# EAGLE board ESP_NOW_uni_FULL (EAGLE 9.7.0)
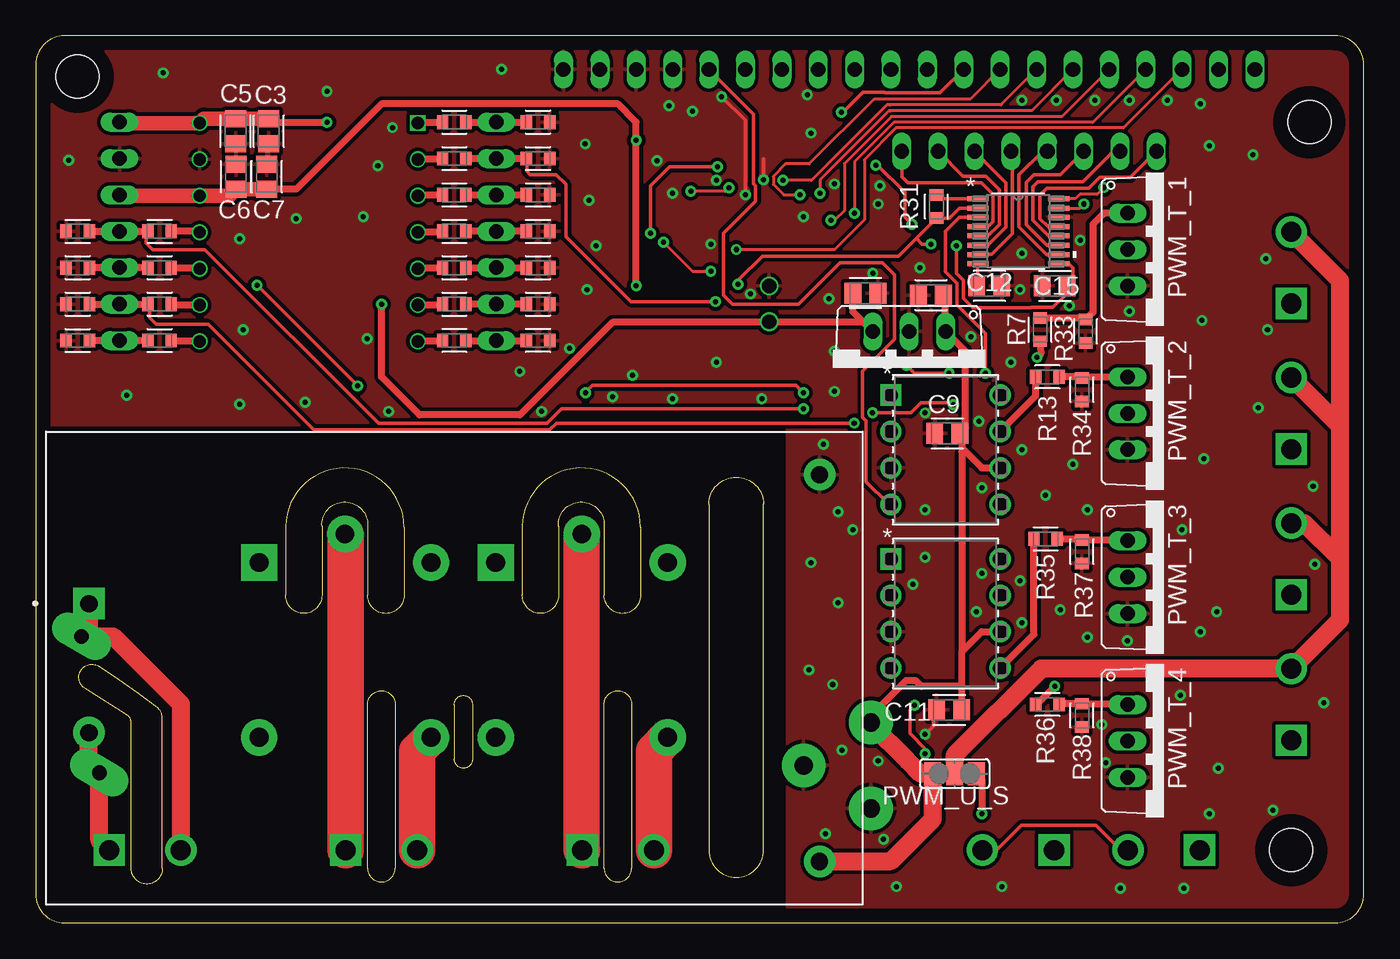
[diagram p0: board, top side]
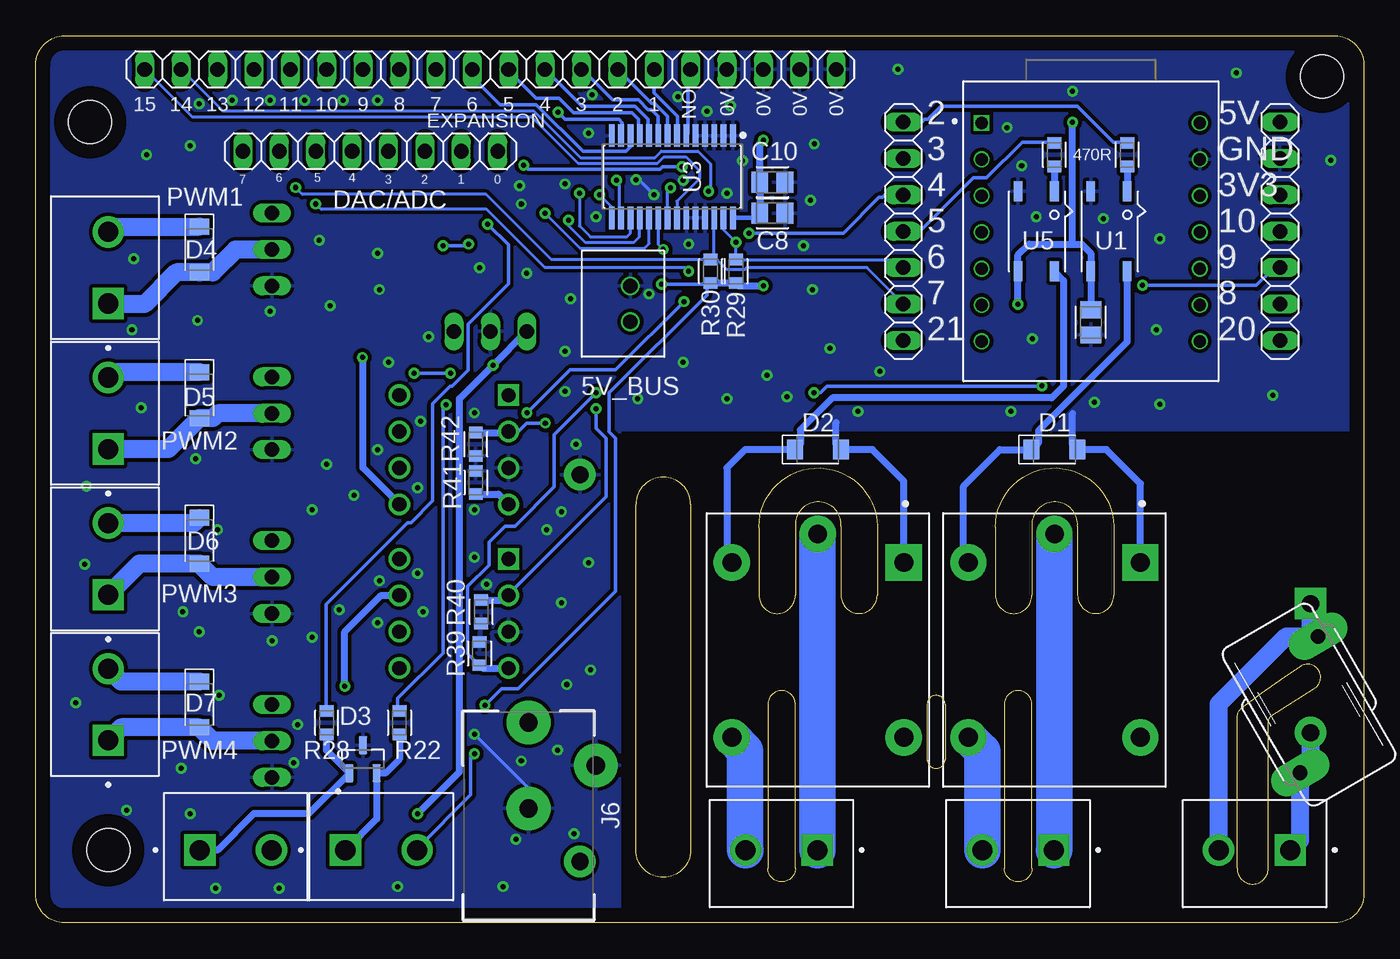
[diagram p1: board, bottom side, seen from below]

Size 92.69 x 61.9 mm. Coordinates in mm from the lower left corner, seen from the top.
Outline: 0,59.9 0,2 arc90 2,0 90.69,0 arc90 92.69,2 92.69,59.9 arc90 90.69,61.9 2,61.9 arc90 0,59.9
Copper layers (1*16): Top 0.035mm / dielectric 1.5mm / Bottom 0.035mm
Design rules "Fusion Electronics Design Rules *": minimum track width 0.2mm, minimum drill 0.35mm, track to track 0.2mm, track to pad 0.2mm, pad to pad 6mil, via to via 6mil, smd to smd 6mil, copper to edge 40mil, drill to drill 6mil, minimum pad ring 0.1mm, minimum via ring 0.204mm, stop-mask expansion 4mil, vias tented up to drill 9999mil, thermal gap 10mil
Holes 3 mm at 88.9,55.88 87.63,5.08 2.92,59.05
tRestrict: 12 lines
Milling: 40 lines

## Footprints (pad centres in the part's own frame; a part is rotated, then mirrored left to right if it is on the bottom)
B2B-XH-A = drill 1: 1 0,0; 2 2.5,0
CAPC2012X110 = smd 1.165 x 1.465: 1 -0.875,0; 2 0.875,0
SODFL3718X115 = smd 1.115 x 1.361: 1 -1.6,0; 2 1.6,0
SOT95P230X110-3N = smd 1.26 x 0.59: 1 -0.98,0.95; 2 -0.98,-0.95; 3 0.98,0
1X08 = drill 1.016 long: 1 -8.89,0; 2 -6.35,0; 3 -3.81,0; 4 -1.27,0; 5 1.27,0; 6 3.81,0; 7 6.35,0; 8 8.89,0
PJ-102AH = drill 1.279 pad 3.051 slot 3 rotated 90: 1 -6.5,0; 2 -0.5,0 | drill 1.279 pad 3.051 slot 3: 3 -3.5,4.7
1X20 = drill 1.016 long: 1 -24.13,0; 2 -21.59,0; 3 -19.05,0; 4 -16.51,0; 5 -13.97,0; 6 -11.43,0; 7 -8.89,0; 8 -6.35,0; 9 -3.81,0; 10 -1.27,0; 11 1.27,0; 12 3.81,0; 13 6.35,0; 14 8.89,0; 15 11.43,0; 16 13.97,0; 17 16.51,0; 18 19.05,0; 19 21.59,0; 20 24.13,0
RELAY_SRD-05VDC-SL-C = drill 1.32 pad 2.54 square: A1 -6.1,6 | drill 1.32 pad 2.54: A2 -6.1,-6; NC 6.1,6; NO 6.1,-6 | drill 1.29 pad 2.54: COM -8.1,0
1X07 = drill 1.016 long: 1 -7.62,0; 2 -5.08,0; 3 -2.54,0; 4 0,0; 5 2.54,0; 6 5.08,0; 7 7.62,0
HANDSON_KF301-2P = drill 1.4 pad 2.184 square: 1 -2.5,0 | drill 1.4 pad 2.184: 2 2.5,0
CONV_HLK-20M12 = drill 1.2 pad 2.184 square: 1 -25.5,4.5 | drill 1.2 pad 2.184: 2 -25.5,-4.5; 3 25.5,13.5; 4 25.5,-13.5
TO220V = drill 1.016 long: 1 -2.54,-2.54; 2 0,-2.54; 3 2.54,-2.54
SJ_2 = smd 1.168 x 1.6: 1 -1.524,0; 2 0,0; 3 1.524,0
RESC1608X60 = smd 0.799 x 0.974: 1 -0.815,0; 2 0.815,0
CLARE_SO4 = smd 0.6 x 1.4: 1 -1.27,-2.8; 2 1.27,-2.8; 3 1.27,2.8; 4 -1.27,2.8
RU-16_ADI = smd 1.461 x 0.351: 1 -2.825,2.275; 2 -2.825,1.625; 3 -2.825,0.975; 4 -2.825,0.325; 5 -2.825,-0.325; 6 -2.825,-0.975; 7 -2.825,-1.625; 8 -2.825,-2.275; 9 2.825,-2.275; 10 2.825,-1.625; 11 2.825,-0.975; 12 2.825,-0.325; 13 2.825,0.325; 14 2.825,0.975; 15 2.825,1.625; 16 2.825,2.275
SOP65P640X110-28 = smd 1.572 x 0.407: 1 -2.872,4.225; 2 -2.872,3.575; 3 -2.872,2.925; 4 -2.872,2.275; 5 -2.872,1.625; 6 -2.872,0.975; 7 -2.872,0.325; 8 -2.872,-0.325; 9 -2.872,-0.975; 10 -2.872,-1.625; 11 -2.872,-2.275; 12 -2.872,-2.925; 13 -2.872,-3.575; 14 -2.872,-4.225; 15 2.872,-4.225; 16 2.872,-3.575; 17 2.872,-2.925; 18 2.872,-2.275; 19 2.872,-1.625; 20 2.872,-0.975; 21 2.872,-0.325; 22 2.872,0.325; 23 2.872,0.975; 24 2.872,1.625; 25 2.872,2.275; 26 2.872,2.925; 27 2.872,3.575; 28 2.872,4.225
MODULE_113991054 = drill 0.85 square: 1 -7.62,7.556 | drill 0.85: 2 -7.62,5.016; 3 -7.62,2.477; 4 -7.62,-0.064; 5 -7.62,-2.603; 6 -7.62,-5.144; 7 -7.62,-7.684; 8 7.62,-7.684; 9 7.62,-5.144; 10 7.62,-2.603; 11 7.62,-0.064; 12 7.62,2.477; 13 7.62,5.016; 14 7.62,7.556
PDIP8_300MC_MCH = drill 0.991 pad 1.499 square: 1 0,0 | drill 0.991 pad 1.499: 2 0,-2.54; 3 0,-5.08; 4 0,-7.62; 5 7.62,-7.62; 6 7.62,-5.08; 7 7.62,-2.54; 8 7.62,0
MOV-10D561 = drill 1.016 pad 2.184 long: 1 -2.921,-3.81; 2 2.921,3.81

## Placement (x,y rotation side)
5V_BUS  B2B-XH-A  [B2B-XH-A]  51.19,44.45 270 bottom
C1  10 uF  [CAPC2012X110]  62.48,43.81 180 top
C2  0.1uF  [CAPC2012X110]  57.91,43.94 0 top
C3  10uF  [CAPC2012X110]  16.26,55.24 270 top
C4  10uF  [CAPC2012X110]  19.05,41.91 270 bottom
C5  10uF  [CAPC2012X110]  13.94,55.24 270 top
C6  10uF  [CAPC2012X110]  13.97,52.07 270 top
C7  10uF  [CAPC2012X110]  16.13,52.07 270 top
C8  10uF  [CAPC2012X110]  41.27,49.53 180 bottom
C9  10uF  [CAPC2012X110]  63.63,34.16 180 top
C10  10uF  [CAPC2012X110]  41.27,51.69 180 bottom
C11  10uF  [CAPC2012X110]  63.75,14.86 180 top
C12  2.2 uF  [CAPC2012X110]  66.55,44.45 0 top
C15  100 nF  [CAPC2012X110]  71.12,44.45 180 top
D1  SCHOTTKY_MBR0520LT1GDO-219  [SODFL3718X115]  21.59,33.02 0 bottom
D2  SCHOTTKY_MBR0520LT1GDO-219  [SODFL3718X115]  38.1,33.02 0 bottom
D3  PESD3V3L2BT,215  [SOT95P230X110-3N]  69.85,11.43 90 bottom
D4  SCHOTTKY_MBR0520LT1GDO-219  [SODFL3718X115]  81.28,46.99 270 bottom
D5  SCHOTTKY_MBR0520LT1GDO-219  [SODFL3718X115]  81.28,36.83 270 bottom
D6  SCHOTTKY_MBR0520LT1GDO-219  [SODFL3718X115]  81.28,26.67 270 bottom
D7  SCHOTTKY_MBR0520LT1GDO-219  [SODFL3718X115]  81.28,15.24 270 bottom
DAC/ADC  PINHD-1X08_1X08M  [1X08]  69.34,53.85 0 bottom
J6  PJ-102AH  [PJ-102AH]  58.3,7.49 270 bottom
JP1  PINHD-1X20  [1X20]  60.96,59.56 180 bottom
K1  SRD-05VDC-SL-C  [RELAY_SRD-05VDC-SL-C]  21.59,19.05 270 bottom
K2  SRD-05VDC-SL-C  [RELAY_SRD-05VDC-SL-C]  38.1,19.05 270 bottom
PHD1  PINHD-1X07_1X07M  [1X07]  5.84,48.26 90 bottom
PHD2  PINHD-1X07_1X07M  [1X07]  32.13,48.26 90 bottom
POWER  KF301-2P  [HANDSON_KF301-2P]  7.62,5.08 180 bottom
PS1  HLK-20M12  [CONV_HLK-20M12]  29.21,17.78 0 top
PWM1  KF301-2P  [HANDSON_KF301-2P]  87.63,45.72 90 bottom
PWM2  KF301-2P  [HANDSON_KF301-2P]  87.63,35.56 90 bottom
PWM3  KF301-2P  [HANDSON_KF301-2P]  87.63,25.4 90 bottom
PWM4  KF301-2P  [HANDSON_KF301-2P]  87.63,15.24 90 bottom
PWM_T_1  IRFB4110PBF  [TO220V]  78.74,46.99 270 top
PWM_T_2  IRFB4110PBF  [TO220V]  78.74,35.56 270 top
PWM_T_3  IRFB4110PBF  [TO220V]  78.74,24.13 270 top
PWM_T_4  IRFB4110PBF  [TO220V]  78.74,12.7 270 top
PWM_U_S  [SJ_2]  64.14,10.41 180 top
R1  [RESC1608X60]  35.05,55.88 180 top
R2  [RESC1608X60]  35.05,53.34 180 top
R3  [RESC1608X60]  35.05,50.8 180 top
R4  [RESC1608X60]  35.05,48.26 180 top
R5  [RESC1608X60]  35.05,45.72 180 top
R6  [RESC1608X60]  35.05,43.18 180 top
R7  47R  [RESC1608X60]  70.1,41.4 270 top
R8  [RESC1608X60]  35.05,40.64 0 top
R9  [RESC1608X60]  2.92,40.64 180 top
R10  [RESC1608X60]  2.92,43.18 180 top
R11  [RESC1608X60]  2.92,45.72 180 top
R12  [RESC1608X60]  2.92,48.26 180 top
R13  47R  [RESC1608X60]  70.61,38.1 0 top
R14  420R  [RESC1608X60]  16.51,53.59 270 bottom
R15  420R  [RESC1608X60]  21.59,53.59 270 bottom
R16  [RESC1608X60]  29.21,55.88 180 top
R17  [RESC1608X60]  29.21,53.34 180 top
R18  [RESC1608X60]  29.21,50.8 180 top
R19  [RESC1608X60]  29.21,48.26 180 top
R20  [RESC1608X60]  29.21,45.72 180 top
R21  [RESC1608X60]  29.21,43.18 180 top
R22  1k  [RESC1608X60]  67.31,13.97 90 bottom
R23  [RESC1608X60]  29.21,40.64 0 top
R24  [RESC1608X60]  8.64,40.64 180 top
R25  [RESC1608X60]  8.64,43.18 180 top
R26  [RESC1608X60]  8.64,45.72 180 top
R27  [RESC1608X60]  8.64,48.26 180 top
R28  1k  [RESC1608X60]  72.39,13.97 270 bottom
R29  [RESC1608X60]  43.81,45.47 90 bottom
R30  [RESC1608X60]  45.59,45.47 270 bottom
R31  [RESC1608X60]  62.87,49.99 270 top
R33  10k  [RESC1608X60]  73.28,41.27 270 top
R34  10k  [RESC1608X60]  73.03,37.21 270 top
R35  47R  [RESC1608X60]  70.48,26.8 180 top
R36  47R  [RESC1608X60]  70.61,15.24 0 top
R37  10k  [RESC1608X60]  73.03,25.91 270 top
R38  10k  [RESC1608X60]  73.03,14.48 270 top
R39  100k  [RESC1608X60]  61.72,18.8 90 bottom
R40  100k  [RESC1608X60]  61.59,21.72 270 bottom
R41  100k  [RESC1608X60]  61.98,30.73 90 bottom
R42  100k  [RESC1608X60]  61.98,33.4 270 bottom
RELAY1  KF301-2P  [HANDSON_KF301-2P]  24.13,5.08 180 bottom
RELAY2  KF301-2P  [HANDSON_KF301-2P]  40.64,5.08 180 bottom
SW1  KF301-2P  [HANDSON_KF301-2P]  68.58,5.08 0 bottom
SW2  KF301-2P  [HANDSON_KF301-2P]  78.74,5.08 0 bottom
U1  CPC1018N  [CLARE_SO4]  17.78,48.26 180 bottom
U2  AD5593RBRUZRU-16_ADI  [RU-16_ADI]  68.58,48.26 0 top
U3  PCA9685PW_28-TSSOP  [SOP65P640X110-28]  48.26,52.07 270 bottom
U4  113991054  [MODULE_113991054]  19.05,48.26 0 bottom
U5  CPC1018N  [CLARE_SO4]  22.86,48.26 180 bottom
U6  TC4427EPAPDIP8_300MC_MCH  [PDIP8_300MC_MCH]  59.69,36.83 0 top
U7  TC4427EPAPDIP8_300MC_MCH  [PDIP8_300MC_MCH]  59.69,25.4 0 top
V2  MOV-10D561K  [MOV-10D561]  3.81,15.24 30 bottom
VR1  LM7805_TO220V OR STEP_DOWN  [TO220V]  60.96,38.73 180 top

## Library data of the parts
5V_BUS = Connector; CATEGORY: Connectors; DATASHEET: https://www.jst-mfg.com/product/pdf/eng/eXH.pdf; DESCRIPTION: Connector Header Through Hole 2 position 0.098" (2.50mm); MANUFACTURER: JST Sales America Inc.; MPN: B2B-XH-A; OPERATING_TEMPERATURE: -25°C ~ 85°C; PACKAGE_SIZE: NA; PACKAGE_TYPE: Through Hole; PART_STATUS: Active; PITCH: 0.098" (2.50mm); ROHS: Compliant; SERIES: XH; SUBCATEGORY: Rectangular Connectors; TYPE: Male Headers
C1-C12 C15 = Capacitor; CATEGORY: Capacitor; PACKAGE_SIZE: 0805; PACKAGE_TYPE: SMD; SUBCATEGORY: Ceramic Capacitors; TYPE: MLCC
D1 D2 D4-D7 = Diode; CATEGORY: Diode; DATASHEET: https://www.onsemi.com/download/data-sheet/pdf/mbr0520lt1-d.pdf; DESCRIPTION: Diode 20 V 500mA Surface Mount SOD-123; FORWARD_CURRENT: 500mA; FORWARD_VOLTAGE: 385mV; MANUFACTURER: onsemi; MPN: MBR0520LT1G; OPERATING_TEMPERATURE: -65°C ~ 125°C; PACKAGE_SIZE: SOD-123; PACKAGE_TYPE: Surface Mount; PART_STATUS: Active; REVERSE_VOLTAGE: 20V; ROHS: Compliant; SERIES: MBR0520; SUBCATEGORY: Schottky Diodes; TYPE: Schottky Power Rectifier; ZENER_VOLTAGE: NA
D3 = PESD3V3L2BT_215; AVAILABILITY: In Stock; CHECK_PRICES: https://www.snapeda.com/parts/PESD3V3L2BT,215/NXP+Semiconductors/view-part/?ref=eda; DESCRIPTION: PESDxL2BT Series 26 V 101 pF Low Capacitance ESD Protection Diode - SOT-23-3; MF: NXP Semiconductors; MP: PESD3V3L2BT,215; PACKAGE: SOT-23-3 NXP Semiconductors; PRICE: None; SNAPEDA_LINK: https://www.snapeda.com/parts/PESD3V3L2BT,215/NXP+Semiconductors/view-part/?ref=snap
DAC/ADC PHD1 PHD2 = Tinkercad
J6 = Connector; CATEGORY_L1: Connectors; CATEGORY_L2: Power Connectors; CATEGORY_L3: DC Jack Male; DATASHEET: https://www.sameskydevices.com/product/resource/pj-102ah.pdf; DESCRIPTION: Power Barrel Connector Jack 2.00mm ID (0.079") & 5.50mm OD (0.217") Through Hole & Right Angle; MANUFACTURER: Same Sky; MPN: PJ-102AH; OPERATING_TEMPERATURE: -25°C ~ 85°C; PACKAGE: Through Hole; PACKAGE_SIZE: NA; PART_STATUS: Active; PITCH: NA; ROHS: Compliant; SERIES: PJ-102
JP1 = Connector; CATEGORY: Connectors; DESCRIPTION: Header-Straight-10 Position; PACKAGE_TYPE: Through Hole; PITCH: 0.100" (2.54mm); SUBCATEGORY: Headers; TYPE: Male Pins
K1 K2 = SRD-05VDC-SL-C; AVAILABILITY: In Stock; CHECK_PRICES: https://www.snapeda.com/parts/SRD-05VDC-SL-C/Songle+Relay/view-part/?ref=eda; DESCRIPTION: 5V Trigger Relay Module For Arduino And Raspberry Pi 5V Trigger Relay Module For Arduino And Raspberry Pi; MF: Songle Relay; MP: SRD-05VDC-SL-C; PACKAGE: NON STANDARD-5 Songle Relay; PRICE: None; SNAPEDA_LINK: https://www.snapeda.com/parts/SRD-05VDC-SL-C/Songle+Relay/view-part/?ref=snap
POWER PWM1-PWM4 RELAY1 RELAY2 SW1 SW2 = KF301-2P; AVAILABILITY: Not in stock; CHECK_PRICES: https://www.snapeda.com/parts/KF301-2P/Handson+Technology/view-part/?ref=eda; DESCRIPTION: 2 Pin Terminal Block 5mm Pitch; MF: Handson Technology; MP: KF301-2P; PACKAGE: None; PRICE: None; SNAPEDA_LINK: https://www.snapeda.com/parts/KF301-2P/Handson+Technology/view-part/?ref=snap
PS1 = HLK-20M12; AVAILABILITY: Not in stock; CHECK_PRICES: https://www.snapeda.com/parts/HLK-20M12/Hi-link/view-part/?ref=eda; DESCRIPTION: 20W ultra-small series module power supply; MF: Hi-link; MP: HLK-20M12; PACKAGE: Non-Standard Hi-link; PRICE: None; SNAPEDA_LINK: https://www.snapeda.com/parts/HLK-20M12/Hi-link/view-part/?ref=snap
PWM_T_1-PWM_T_4 = IRL540N; AVAILABILITY: In Stock; CHECK_PRICES: https://www.snapeda.com/parts/IRL540N/Infineon/view-part/?ref=eda; DESCRIPTION: N-Channel 100 V 36A (Tc) 3.8W (Ta), 140W (Tc) Surface Mount D2PAK; MF: Infineon Technologies; MP: IRL540N; PACKAGE: TO-220 Infineon; PRICE: None; PURCHASE-URL: https://www.snapeda.com/api/url_track_click_mouser/?unipart_id=2773806&manufacturer=Infineon Technologies&part_name=IRL540N&search_term=None; SNAPEDA_LINK: https://www.snapeda.com/parts/IRL540N/Infineon/view-part/?ref=snap
PWM_U_S = jumper
R1-R31 R33-R42 = Resistor; CATEGORY: Resistors; DESCRIPTION: Chip Resistor 1.60 X 0.82 X 0.60 mm body 0603(1608-METRIC) Package; PACKAGE_SIZE: 0603; PACKAGE_TYPE: SMD
U1 U5 = CPC1018N; AVAILABILITY: In Stock; CHECK_PRICES: https://www.snapeda.com/parts/CPC1018N/IXYS/view-part/?ref=eda; DESCRIPTION: Solid State Photo-Coupled Relay (Photorelay) SPST-NO (1 Form A) 4-SOP (0.150, 3.81mm); MF: IXYS Integrated Circuits; MP: CPC1018N; PACKAGE: SOP-4 Ixys Corporation; PRICE: None; SNAPEDA_LINK: https://www.snapeda.com/parts/CPC1018N/IXYS/view-part/?ref=snap
U2 = 2026-07-31_06-15-37_Library; COPYRIGHT: Copyright (C) 2026 Ultra Librarian. All rights reserved.; DATASHEET: https://www.analog.com/media/en/technical-documentation/data-sheets/AD5593R.pdf; DESCRIPTION: 8-Channel, 12-Bit, Configurable ADC/DAC with On-Chip Reference, I2C Interface; MANUFACTURER_NAME: Analog Devices Inc; MANUFACTURER_PART_NUMBER: AD5593RBRUZ
U3 = IC_Power-Management; CATEGORY: Power Management IC; DATASHEET: https://www.nxp.com/docs/en/data-sheet/PCA9685.pdf; DESCRIPTION: LED Driver IC 16 Output Linear PWM Dimming 25mA 28-TSSOP; INPUT_VOLTAGE: 2.3V ~ 5.5V; MANUFACTURER: NXP USA Inc.; MPN: PCA9685PW118; OPERATING_TEMPERATURE: -40°C ~ 85°C; OUTPUT_CURRENT: 25mA; OUTPUT_VOLTAGE: 5.5V; PACKAGE_SIZE: 28-TSSOP; PACKAGE_TYPE: Surface Mount; PART_STATUS: Active; ROHS: Compliant; SERIES: PCA9685; SUBCATEGORY: LED Drivers; THERMALLOSS: 0.4 W; TOPOLOGY: NA; TYPE: Linear
U4 = esp32c3_seeed; AVAILABILITY: In Stock; CHECK_PRICES: https://www.snapeda.com/parts/113991054/Seeed+Studio/view-part/?ref=eda; DESCRIPTION: - ESP32-C3 Transceiver; 802.11 a/b/g/n (Wi-Fi, WiFi, WLAN), Bluetooth® Smart 4.x Low Energy (BLE) 2.4GHz Evaluation Board; MF: Seeed Technology Co., Ltd; MP: 113991054; PACKAGE: None; PRICE: None; SNAPEDA_LINK: https://www.snapeda.com/parts/113991054/Seeed+Studio/view-part/?ref=snap
U6 U7 = 2026-03-07_17-24-57_Library; COPYRIGHT: Copyright (C) 2026 Ultra Librarian. All rights reserved.; MANUFACTURER_NAME: Microchip; MANUFACTURER_PART_NUMBER: TC4427EPA
V2 = MOV-10D561K; AVAILABILITY: In Stock; CHECK_PRICES: https://www.snapeda.com/parts/MOV-10D561K/Bourns/view-part/?ref=eda; DESCRIPTION: 560 V 2.5 kA Varistor 1 Circuit Through Hole Disc 10mm; MF: Bourns; MP: MOV-10D561K; PACKAGE: Disc-10 Bourns; PRICE: None; SNAPEDA_LINK: https://www.snapeda.com/parts/MOV-10D561K/Bourns/view-part/?ref=snap
VR1 = IC_Power-Management; CATEGORY: Power Management IC; DESCRIPTION: Linear Voltage Regulator IC TO-220; PACKAGE_SIZE: TO-220; PACKAGE_TYPE: THT; SERIES: LM7805; SUBCATEGORY: Voltage Regulators; TYPE: Linear & LDO Regulators

## Nets
3V3: C6.2 C7.2 C8.2 C10.2 C15.1 PHD1.5 R29.1 R30.2 R31.2 SW1.2 SW2.2 U2.2 U2.9 U3.28 U4.12
5V: 5V_BUS.2 C2.1 C3.1 C4.1 C5.1 PHD1.7 PWM_U_S.1 U1.3 U2.3 U4.14 U5.3 VR1.3
12V: C1.1 C9.1 C11.1 J6.1 PS1.4 PWM_U_S.3 U6.6 U7.6 VR1.1
EX_PWM1: JP1.6 U3.7
EX_PWM2: JP1.7 U3.8
EX_PWM3: JP1.8 U3.9
EX_PWM4: JP1.9 U3.10
EX_PWM5: JP1.10 U3.11
EX_PWM6: JP1.11 U3.12
EX_PWM7: JP1.12 U3.13
EX_PWM8: JP1.13 U3.15
EX_PWM9: JP1.14 U3.16
EX_PWM10: JP1.15 U3.17
EX_PWM11: JP1.16 U3.18
EX_PWM12: JP1.17 U3.19
EX_PWM13: JP1.18 U3.20
EX_PWM14: JP1.19 U3.21
EX_PWM15: JP1.20 U3.22
FET1_B: R25.1 U4.9
FET2_B: R26.1 U4.10
FET3: R27.1 U4.11
GND: 5V_BUS.1 C1.2 C2.2 C3.2 C4.2 C5.2 C6.1 C7.1 C8.1 C9.2 C10.1 C11.2 C12.2 C15.2 D1.2 D2.2 D3.3 J6.2 J6.3 JP1.1 JP1.2 JP1.3 JP1.4 K1.A1 K2.A1 PHD1.6 PS1.3 PWM_T_1.3 PWM_T_2.3 PWM_T_3.3 PWM_T_4.3 R1.1 R2.1 R3.1 R4.1 R5.1 R6.1 R8.2 R9.2 R10.2 R11.2 R12.2 R33.2 R34.2 R37.2 R38.2 R39.2 R40.2 R41.2 R42.2 U1.2 U2.14 U3.1 U3.2 U3.3 U3.4 U3.5 U3.14 U3.23 U3.24 U3.25 U4.13 U5.2 U6.3 U7.3 VR1.2
IO0: DAC/ADC.8 U2.4
IO1: DAC/ADC.7 U2.5
IO2: DAC/ADC.6 U2.6
IO3: DAC/ADC.5 U2.7
IO4: DAC/ADC.4 U2.10
IO5: DAC/ADC.3 U2.11
IO6: DAC/ADC.2 U2.12
IO7: DAC/ADC.1 U2.13
L: POWER.2 PS1.1 V2.2
L1I: K1.COM RELAY1.1
L1O: K1.NO RELAY1.2
L2I: K2.COM RELAY2.1
L2O: K2.NO RELAY2.2
N: POWER.1 PS1.2 V2.1
N$1: PWM_T_1.1 R7.1 R33.1
N$2: D3.2 R22.1 SW1.1
N$3: R23.1 U4.7
N$4: R24.1 U4.8
N$5: D3.1 R28.2 SW2.1
N$6: C12.1 U2.8
N$8: D2.1 K2.A2 U5.4
N$9: D1.1 K1.A2 U1.4
N$10: R31.1 U2.1
N$11: PWM_T_2.1 R13.2 R34.1
N$12: PWM_T_3.1 R35.1 R37.1
N$13: PHD1.1 R9.1 R24.2
N$14: PHD2.1 R8.1 R23.2
N$15: PWM_T_4.1 R36.2 R38.1
N$16: PHD2.4 R4.2 R15.1 R19.1
N$17: R7.2 U6.5
N$18: R14.2 U1.1
N$19: R15.2 U5.1
N$20: R13.1 U6.7
N$23: R36.1 U7.7
N$24: R35.2 U7.5
N$30: PHD2.7 R1.2 R14.1 R16.1
PWM1: PHD1.2 R10.1 R25.2 R42.1 U6.2
PWM1_OUT: D4.2 PWM1.1 PWM_T_1.2
PWM2_OUT: D5.2 PWM2.1 PWM_T_2.2
PWM2_SLOW: JP1.5 R41.1 U3.6 U6.4
PWM3: PHD1.4 R12.1 R27.2 R40.1 U7.2
PWM3_OUT: D6.2 PWM3.1 PWM_T_3.2
PWM4: PHD1.3 R11.1 R26.2 R39.1 U7.4
PWM4_OUT: D7.2 PWM4.1 PWM_T_4.2
PWM_VCC: D4.1 D5.1 D6.1 D7.1 PWM1.2 PWM2.2 PWM3.2 PWM4.2 PWM_U_S.2
RELE1: R16.2 U4.1
RELE2: R19.2 U4.4
SCL: PHD2.2 R6.2 R21.1 R30.1 U2.16 U3.26
SCL_E: R21.2 U4.6
SDA: PHD2.3 R5.2 R20.1 R29.2 U2.15 U3.27
SDA_E: R20.2 U4.5
SW1: PHD2.6 R2.2 R17.1 R22.2
SW2: PHD2.5 R3.2 R18.1 R28.1
SWITCH1: R18.2 U4.3
SWITCH2: R17.2 U4.2

## Tracks (layer width: path | path; a pad name or v marks a point on that pad's centre or on a via)
3V3  (via drill 0.35)
  Top 0.254: SW1.2 66.28,5.22 67.19,5.22 68.78,6.81 74,6.81 75.59,5.22 76.05,5.22 SW2.2 | v62.08,11.8 62.08,12.17 61.01,13.24 61.01,14.85 v61.34,15.18 | U2.9 72.12,45.98 72.39,45.72 72.39,44.84 C15.1 72,43.93 71.01,42.94 69.48,42.94 69.46,42.93 65.42,42.93 64.76,43.58 64.76,44.83 64.26,45.33 v64.26,47.24 | U2.2 64.48,49.88 63.77,49.17 R31.2 61.45,47.77 | v49.02,44.58 49.02,44.83 50.71,46.52 60.21,46.52 61.45,47.77 | v62.48,47.37 61.85,47.37 61.45,47.77
  Top 0.5: v41.91,44.45 v41.91,54.61 41.91,55.88 40.64,57.15 24.13,57.15 18.18,51.2 C7.2
  Top 1.016: C7.2 C6.2 13.51,50.74 U4.12 5.91,50.74 PHD1.5
  Bottom 0.254: v61.34,15.18 60.18,16.34 59.02,16.34 52.21,23.15 52.21,33.82 52.66,34.28 52.66,37 45.85,43.81 45.85,44.49 45.77,44.58 | SW1.2 66.06,5.22 62.33,8.95 62.33,11.55 v62.08,11.8 | R30.2 45.63,44.72 45.77,44.58 | v49.02,44.58 45.77,44.58 | v64.26,47.24 62.61,47.24 v62.48,47.37
  Bottom 0.305: 42.48,49.2 U3.28
  Bottom 0.5: 42.48,49.2 C8.2 C10.2 42.15,54.37 v41.91,54.61 | R30.2 R29.1 43.61,44.45 v41.91,44.45
5V  (via drill 0.35)
  Top 0.254: U2.3 64.47,49.23 63.5,48.26 63.5,45.45 64.31,44.64 64.31,43.13 66.29,41.15 v66.29,38.35 | v63.75,38.35 61.34,38.35 v60.77,38.92
  Top 0.5: v24.13,43.18 24.13,38.1 26.78,35.45 33.8,35.45 40.26,41.91 51.15,41.91 5V_BUS.2 57.74,41.95 VR1.3 57.04,42.66 C2.1 | v20.32,55.88 16.5,55.88 C3.1 | PWM_U_S.1 66.04,10.03 v66.04,7.62
  Top 1.016: C3.1 C5.1 11.73,56.12 U4.14 5.91,55.82 PHD1.7
  Bottom 0.254: v66.29,38.35 v63.75,38.35
  Bottom 0.5: C4.1 U1.3 19.05,46.74 19.68,47.37 20.32,47.37 | 20.32,47.37 23.37,47.37 24.13,46.61 U5.3 v24.13,43.18 | 20.32,47.37 v20.32,55.88 | v66.04,7.62 63.11,10.55 63.11,36.58 v60.77,38.92 VR1.3
12V
  Top 0.5: C1.1 63.5,43.67 VR1.1 64.89,39.88 64.89,34.55 C9.1 64.63,34.04 64.63,32.88 | U6.6 66.04,31.75 64.77,33.02 64.63,32.88 | C11.1 64.63,16.51 | 64.63,16.51 64.63,18.91 | 64.63,18.91 66.04,20.32 U7.6 | 64.63,32.88 64.63,18.91 | 64.63,16.51 61.82,16.51 61.43,16.9 60.75,16.9 58.3,14.45 J6.1
  Top 1.27: PS1.4 54.75,4.32 59.69,4.32 62.61,7.24 PWM_U_S.3 61.75,10.41 60.86,11.3 58.3,13.87 J6.1
EX_PWM1
  Bottom 0.254: U3.7 47.9,55.16 47.9,56.3 49.53,57.93 JP1.6
EX_PWM2
  Bottom 0.254: U3.8 48.58,55.16 48.58,56.3 49.49,57.2 49.71,57.2 JP1.7
EX_PWM3
  Bottom 0.254: U3.9 49.26,55.16 49.26,56.3 49.71,56.75 49.94,56.75 50.62,57.43 52.44,57.43 54.57,59.56 JP1.8
EX_PWM4
  Bottom 0.254: U3.10 49.94,55.16 49.94,56.07 50.85,56.98 54.56,56.98 JP1.9
EX_PWM5
  Bottom 0.254: U3.11 50.62,55.16 50.62,56.07 51.08,56.52 55.16,56.52 56.18,57.54 57.77,57.54 59.69,59.46 JP1.10
EX_PWM6
  Bottom 0.254: U3.12 51.17,54.15 51.5,53.83 54.49,53.83 57.75,57.09 60.27,57.09 62.23,59.05 JP1.11
EX_PWM7  (via drill 0.35)
  Top 0.254: JP1.12 63.12,57.91 59.28,57.91 59.24,57.96 57.73,57.96 56.35,56.58 v56.24,56.58
  Bottom 0.254: U3.13 51.76,55.16 51.76,55.84 51.98,56.07 55.74,56.07 v56.24,56.58
EX_PWM8  (via drill 0.35)
  Top 0.2: JP1.13 65.23,57.49 58.5,57.49 53.98,52.96 52.34,52.96 51.48,52.1 51.48,51.53 52.21,50.8 v53.34,50.8
  Bottom 0.2: v53.34,50.8 52.48,49.95 U3.15
EX_PWM9  (via drill 0.35)
  Top 0.2: JP1.14 67.38,57.09 59.69,57.09 59.56,57.09 59.41,57.09 54.14,51.82 v52.16,51.82
  Bottom 0.2: U3.16 51.94,49.31 51.94,51.6 v52.16,51.82
EX_PWM10  (via drill 0.35)
  Top 0.2: JP1.15 69.52,56.69 59.69,56.69 | 59.69,56.69 59.67,56.67 59.65,56.67 | 59.69,56.69 59.67,56.69 59.65,56.67 | v54.74,50.93 54.74,51.85 59.56,56.67 59.65,56.67
  Bottom 0.2: v54.74,50.93 54.74,48.64 53.98,47.88 51.44,47.88 51.19,48.13 U3.17
EX_PWM11  (via drill 0.35)
  Top 0.2: v55.5,49.02 55.75,49.02 56.43,49.7 56.43,52.98 59.72,56.27 71.64,56.27 JP1.16
  Bottom 0.2: v55.5,49.02 55.5,48.64 54.34,47.48 50.95,47.48 50.55,47.87 50.55,49.21
  Bottom 0.254: 50.55,49.21 U3.18
EX_PWM12  (via drill 0.35)
  Top 0.2: JP1.17 73.78,55.87 59.89,55.87 57.15,53.13 v57.15,49.53
  Bottom 0.2: U3.19 49.88,47.4 50.2,47.08 54.7,47.08 v57.15,49.53
EX_PWM13  (via drill 0.35)
  Top 0.2: v48.9,46.99 55.75,46.99 57.83,49.07 57.83,53.24 60.05,55.47 75.92,55.47 JP1.18
  Bottom 0.2: v48.9,46.99 49.23,47.33 U3.20
EX_PWM14  (via drill 0.35)
  Top 0.2: v48.39,51.31 48.13,51.05 v45.72,51.05
  Bottom 0.2: JP1.19 79.65,56.66 57.93,56.66 54.67,53.4 49.47,53.4 49.02,53.85 46.48,53.85 45.59,52.96 45.59,51.18 v45.72,51.05 | U3.21 48.59,51.11 v48.39,51.31
EX_PWM15
  Bottom 0.2: JP1.20 81.79,56.26 58.1,56.26 54.84,53 49.3,53 48.86,53.45 47.31,53.45 46.35,52.5 46.35,51.94 47.94,50.36 U3.22
FET1_B
  Top 0.5: U4.9 9.52,43.12 R25.1
FET2_B
  Top 0.5: R26.1 11.37,45.72 U4.10
FET3
  Top 0.5: U4.11 11.37,48.26 R27.1
GND  (via drill 0.35)
  Top 0.254: C11.2 62.65,14.63 62.65,13.74 v62.08,13.17 | v47.88,57.66 49.53,56.01 v49.53,50.8 | v50.8,51.87 50.8,53.34
  Bottom 0.254: v49.53,50.8 50.6,51.87 v50.8,51.87 | v62.08,13.17 58.3,9.38 J6.2 58.27,8.02
  Bottom 0.5: K2.A1 32.1,30.83 34.29,33.02 D2.2 36.83,33.35 36.83,34.92 | K1.A1 15.59,30.65 17.96,33.02 D1.2 20.32,33.35 20.32,35.56
  other vias: 6.35,36.83 14.22,36.2 14.48,41.4 23.11,40.77 18.16,49.15 14.22,47.75 22.86,49.28 23.88,52.83 24.89,55.5 20.32,58.04 8.89,59.31 2.29,53.21 32.51,59.56 38.35,54.36 38.61,50.42 39.12,47.24 38.48,44.2 33.78,38.48 18.8,36.32 41.66,38.23 47.5,39.12 44.2,57.02 85.85,46.35 85.98,41.4 81.41,42.04 55.75,39.88 55.75,37.08 68.83,33.02 66.04,30.35 57.02,27.43 54.99,33.4 54.1,25.15 56.01,22.35 53.98,17.65 66.04,24.38 65.66,21.72 68.83,20.95 68.71,23.88 71.5,21.84 73.41,19.94 82.42,21.72 81.28,20.32 82.55,10.79 79.88,15.88 74.42,13.84 89.92,15.37 74.68,11.18 76.2,19.68 73.41,28.83 72.39,32 61.21,23.62 58.8,11.3 59.18,5.84 55.12,6.22 56.26,12.06 60.07,2.54 67.44,2.54 75.69,2.41 80.14,2.41 81.92,7.62 86.36,7.87 89.28,25.02 80.01,27.43 81.53,32.38 89.15,30.48 85.34,35.94 37.26,40.08 35.31,35.69 24.64,35.69 44.45,36.58 50.67,36.58 40.26,36.7 56.01,28.7 55.63,16.64 65.83,35.01 62.08,25.53 62.08,28.83 62.08,35.58 43.36,53.17 49.89,43.89 76.33,42.67 72.9,47.62 68.83,46.74 68.71,44.2 68.07,39.12 65.28,40.89 61.72,45.72 58.8,50.16 55.37,43.56 70.48,29.84 58.93,51.44 81.92,54.23 84.96,53.59 68.83,57.4 73.91,57.4 71.25,57.4 76.33,57.4 78.99,57.4 81.28,57.15 72.14,43.05 47.12,47.37 45.85,56.64 44.45,50.93 47.5,51.82 54.1,55.12 53.85,57.78 58.42,45.34 55.75,51.56 53.59,49.28
  pour Bottom (isolate 0.254): -2.41,62.1 -2.41,34.42 51.84,34.42 51.89,34.4 51.92,34.36 51.94,34.32 51.94,0.13 92.58,0.13 92.58,62.1
  pour Top (isolate 0.254): -1.14,62.1 -1.14,34.42 51.84,34.42 51.89,34.4 51.92,34.36 51.94,34.32 51.94,0.13 92.58,0.13 92.58,62.1
IO0
  Top 0.254: DAC/ADC.8 60.45,52.07 60.86,51.66 66,51.66 66.81,50.85 66.81,48.92 66.47,48.59 U2.4
IO1
  Top 0.254: DAC/ADC.7 64.73,52.11 66.32,52.11 67.27,51.16 67.27,48.73 66.47,47.94 U2.5
IO2
  Top 0.254: DAC/ADC.6 67.72,51.66 67.72,48.53 66.47,47.28 U2.6
IO3
  Top 0.254: U2.7 65.78,46.66 66.74,46.66 68.17,48.09 68.17,53.74 DAC/ADC.5
IO4
  Top 0.254: DAC/ADC.4 70.29,53.85 68.63,52.19 68.63,48.58 70.57,46.63 U2.10
IO5
  Top 0.254: U2.11 70.56,47.28 69.13,48.72 69.13,51.67 69.66,52.2 71.5,52.2 DAC/ADC.3
IO6
  Top 0.254: DAC/ADC.2 75.21,53.85 73.09,51.73 69.96,51.73 69.58,51.35 69.58,49.03 70.68,47.94 U2.12
IO7
  Top 0.254: U2.13 70.67,48.59 70.1,49.15 70.1,50.8 70.58,51.27 73.51,51.27 74.27,52.02 76.41,52.02 DAC/ADC.1
L
  Top 1.27: PS1.1 3.71,20.52 V2.2 5.4,20 10.12,15.28 POWER.2
  Bottom 1.27: POWER.2 10.12,15.28 5.4,20 V2.2 3.71,20.52 PS1.1
L1I
  Top 2.54: RELAY1.1 21.63,27.11 K1.COM
  Bottom 2.54: RELAY1.1 21.59,5.12 K1.COM
L1O
  Top 2.54: RELAY1.2 26.63,11.99 K1.NO
  Bottom 2.54: RELAY1.2 26.63,11.99 K1.NO
L2I
  Top 2.54: RELAY2.1 38.1,5.12 K2.COM
  Bottom 2.54: RELAY2.1 38.14,27.11 K2.COM
L2O
  Top 2.54: RELAY2.2 43.14,11.99 K2.NO
  Bottom 2.54: RELAY2.2 43.18,5.12 43.18,12.03 K2.NO
N
  Top 1.27: POWER.1 4.43,5.76 V2.1 3.71,11.21 PS1.2
  Bottom 1.27: POWER.1 4.43,5.76 V2.1 3.71,11.21 PS1.2
N$1
  Top 0.5: R7.1 73.15,42.22 R33.1 73.79,42.6 73.79,48.77 74.55,49.53 PWM_T_1.1
N$2
  Bottom 0.5: SW1.1 68.9,7.26 D3.2 68.29,10.45 67.31,11.43 R22.1
N$3
  Top 0.5: U4.7 26.73,40.64 R23.1
N$4
  Top 0.5: R24.1 11.37,40.64 U4.8
N$5
  Bottom 0.5: SW2.1 80.01,5.08 77.47,7.62 73.63,7.62 D3.1 72.39,12.04 R28.2
N$6
  Top 0.2: U2.8 65.75,44.53 C12.1
N$8
  Bottom 0.5: U5.4 20.95,44.83 20.95,37.47 21.78,36.64 37.09,36.64 39.33,34.4 39.33,33.39 D2.1 43.18,33.02 44.45,31.75 44.45,25.5 K2.A2
N$9
  Bottom 0.5: K1.A2 27.94,25.5 27.94,30.48 25.4,33.02 D1.1 22.69,33.52 22.69,34.37 16.51,40.55 U1.4
N$10
  Top 0.254: U2.1 63.13,50.53 R31.1
N$11
  Top 0.5: R13.2 72.95,38.1 R34.1 73.1,38.1 PWM_T_2.1
N$12
  Top 0.5: R35.1 72.95,26.8 R37.1 76.15,26.72 PWM_T_3.1
N$13
  Top 0.5: R24.2 PHD1.1 R9.1
N$14
  Top 0.5: R23.2 PHD2.1 R8.1
N$15
  Top 0.5: R36.2 71.48,15.29 R38.1 76.15,15.29 PWM_T_4.1
N$16
  Top 0.5: R4.2 PHD2.4 R19.1
  Bottom 0.254: R15.1 21.79,54.48 23.84,54.48 26.33,51.98 27.24,51.98 30.87,48.35 32.01,48.35 PHD2.4
N$17  (via drill 0.35)
  Top 0.5: v69.89,39.45 70.14,39.7 R7.2
  Bottom 0.5: U6.5 69.85,31.75 69.85,39.41 v69.89,39.45
N$18
  Bottom 0.5: R14.2 U1.1
N$19
  Bottom 0.5: R15.2 U5.1
N$20
  Top 0.5: U6.7 69.8,36.78 R13.1
N$23  (via drill 0.35)
  Top 0.5: R36.1 69.85,15.24 v71.12,16.51
  Bottom 0.5: v71.12,16.51 71.12,20.32 68.58,22.86 U7.7
N$24
  Top 0.5: U7.5 69.67,20.14 R35.2
N$30
  Top 0.5: R16.1 PHD2.7 R1.2
  Bottom 0.254: R14.1 16.57,54.48 17.48,54.48 19.98,56.98 29.51,56.98 30.42,56.07 30.64,56.07 30.87,55.84 32.01,55.84 PHD2.7
PWM1  (via drill 0.35)
  Top 0.254: R25.2 7.95,43.13 7.95,42.22 8.4,41.77 12.03,41.77 19.38,34.42 35.88,34.42 36.34,34.88 v57.12,34.88
  Top 0.5: R10.1 PHD1.2 R25.2
  Bottom 0.254: U6.2 59.47,34.28 59.02,34.28 58.42,34.88 v57.12,34.88
  Bottom 0.5: R42.1 59.76,34.22 U6.2
PWM1_OUT
  Bottom 1.27: PWM_T_1.2 78.74,46.99 80.34,45.39 D4.2 82.88,45.39 85.09,43.18 87.59,43.18 PWM1.1
PWM2_OUT
  Bottom 1.27: PWM_T_2.2 80.01,35.56 80.34,35.23 D5.2 83.45,33.06 PWM2.1
PWM2_SLOW
  Top 0.254: U6.4 59.47,29.28 57.96,30.79 57.96,35.04 57.71,35.29 57.71,38.51 59.94,40.74 59.94,45.21 59.09,46.06 56.13,46.06 53.25,43.18 48.64,43.18 48.01,43.81 48.01,48.13 50.24,50.36 50.24,51.43 50.09,51.58 50.09,56.44 46.99,59.55 JP1.5
  Bottom 0.254: JP1.5 47.17,59.38 47.17,55.05 U3.6
  Bottom 0.5: R41.1 60.4,29.92 U6.4
PWM3  (via drill 0.35)
  Top 0.254: R27.2 7.72,48.12 7.72,47.44 8.17,46.99 11.8,46.99 23.92,34.87 35.69,34.87 36.68,35.87 v53.57,35.87
  Top 0.5: R12.1 PHD1.4 R27.2
  Bottom 0.254: v53.57,35.87 53.57,34.5 52.89,33.82 52.89,29.74 59.47,23.15 59.47,22.93 U7.2
  Bottom 0.5: R40.1 60.02,22.53 U7.2
PWM3_OUT
  Bottom 1.27: PWM_T_3.2 80.34,24.13 D6.2 85.46,25.07 PWM3.1
PWM4  (via drill 0.35)
  Top 0.254: v38.36,37 38.87,37.51 53.06,37.51 v53.57,37 | v15.44,44.49 22.46,37.47 v22.47,37.47
  Top 0.5: R26.2 PHD1.3 R11.1
  Bottom 0.254: v53.57,37 56.52,34.05 56.52,30.42 59.25,27.69 59.93,27.69 61.06,26.56 61.06,24.97 62.54,23.5 62.54,18.8 R39.1 | v38.36,37 37.91,37 37.45,37.45 22.49,37.45 v22.47,37.47 | v15.44,44.49 7.49,44.49 6.36,45.63 5.9,45.63 PHD1.3
  Bottom 0.5: R39.1 61.52,17.78 U7.4
PWM4_OUT
  Bottom 1.27: PWM_T_4.2 80.34,12.7 D7.2 86.73,13.64 PWM4.1
PWM_VCC
  Top 1.27: 91.04,25.4 91.04,21.15 PWM4.2 70.19,17.74 64.14,11.68 PWM_U_S.2 | 91.04,25.4 88.54,27.9 PWM3.2 | 91.04,25.4 91.04,34.65 | 91.04,34.65 PWM2.2 | 91.04,34.65 91.04,44.81 PWM1.2
  Bottom 1.27: PWM1.2 87.26,48.59 D4.1 | D5.1 87.26,38.43 PWM2.2 | D6.1 81.65,27.9 PWM3.2 | D7.1 86.73,16.84 PWM4.2
RELE1
  Top 0.5: U4.1 26.73,55.88 R16.2
RELE2
  Top 0.5: R19.2 28.33,48.2 U4.4
SCL  (via drill 0.35)
  Top 0.2: U2.16 72.56,50.53 72.87,50.84 74.08,50.84 v74.56,51.32
  Top 0.5: R6.2 PHD2.2 R21.1
  Bottom 0.2: U3.26 45.34,46.54 R30.1 | PHD2.2 34.67,45.72 43.07,45.72 43.2,45.58 44.43,45.58 45.13,46.28 R30.1 | R30.1 56.7,46.28 61.26,50.84 74.08,50.84 v74.56,51.32
SCL_E
  Top 0.5: R21.2 28.33,43.12 U4.6
SDA  (via drill 0.35)
  Top 0.2: v43.81,47.5 45.85,45.47 v47.12,45.47 | v73.15,50.16 72.87,49.88 U2.15
  Top 0.5: R20.1 PHD2.3 R5.2
  Bottom 0.2: PHD2.3 32.69,46.28 R29.2 v43.81,47.5 44.69,48.37 U3.27 | v47.12,45.47 47.37,45.72 57.15,45.72 61.21,49.78 72.77,49.78 v73.15,50.16
SDA_E
  Top 0.5: U4.5 26.73,45.72 R20.2
SW1  (via drill 0.35)
  Top 0.254: v47.44,43.36 41.54,43.36 37,47.9 37,51.53 36.32,52.21 34.5,52.21 34.28,52.44 34.28,52.89 34.5,53.12 34.28,53.34 R2.2 | v64.06,36.15 63.92,36.29 61.79,36.29 61.08,35.59 v58.41,35.59
  Top 0.5: R17.1 PHD2.6 R2.2
  Bottom 0.254: v47.44,43.36 52.21,38.59 55.41,38.59 v58.41,35.59 | R22.2 67.42,14.98 67.42,15.66 64.27,18.81 64.27,35.94 v64.06,36.15
SW2  (via drill 0.35)
  Top 0.254: v42.9,48.12 42.9,51.43 44.25,52.77 v47.59,52.77 | v58.63,52.88 58.75,52.88 60.66,50.98 60.66,49.26 v61.15,48.76
  Top 0.5: R18.1 PHD2.5 R3.2
  Bottom 0.254: v42.9,48.12 36.32,48.12 33.82,50.62 33.6,50.62 33.37,50.85 32.23,50.85 PHD2.5 | R28.1 72.41,14.98 72.41,22.25 66.74,27.92 66.51,27.92 64.98,29.45 64.98,36.23 63.76,37.45 63.62,37.45 62.51,38.56 62.51,41.78 59.7,44.59 59.7,47.31 v61.15,48.76 | v47.59,52.77 48.93,52.77 49.13,52.58 58.33,52.58 v58.63,52.88
SWITCH1
  Top 0.5: U4.3 26.73,50.8 R18.2
SWITCH2
  Top 0.5: U4.2 26.73,53.34 R17.2

## Text on the board
bNames: 0V | 0V | 0V | 0V | NO | 1 | 2 | 3 | 4 | 5 | 6 | 7 | 8 | 9 | 10 | 11 | 12 | 13 | 14 | 15 | EXPANSION | 470R | 0 | 1 | 2 | 3 | 4 | 5 | 6 | 7 | 5V / GND / 3V3 / 10 / 9 / 8 / 20 | 2 / 3 / 4 / 5 / 6 / 7 / 21